# EAGLE board isl1 (EAGLE 7.5.0)
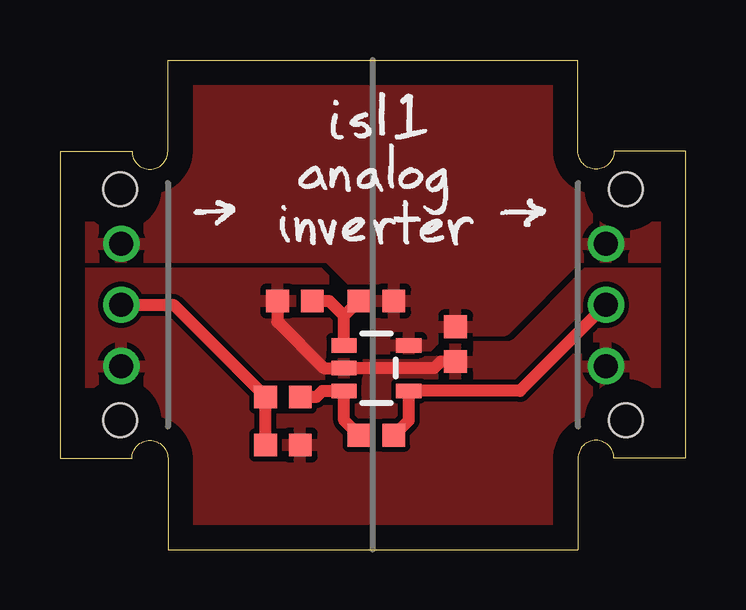
[diagram p0: board, top side]
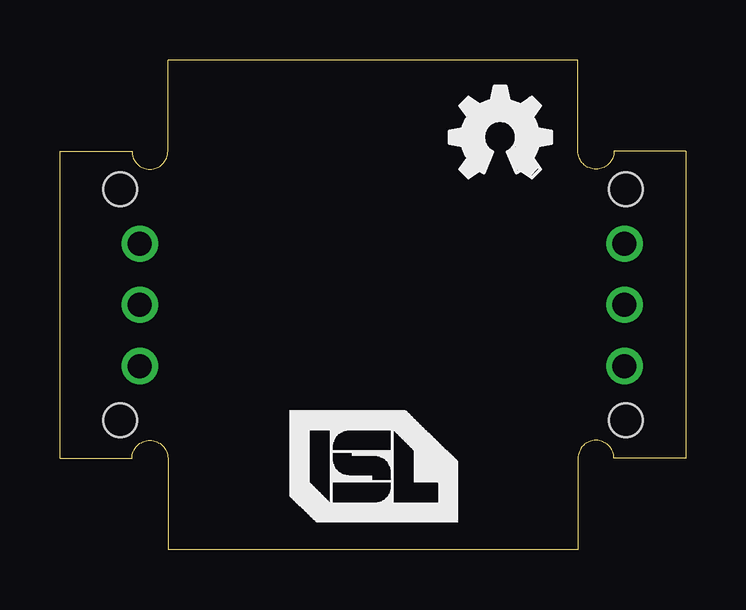
[diagram p1: board, bottom side, seen from below]

Size 26.1 x 20.4 mm. Coordinates in mm from the lower left corner, seen from the top.
Outline: 4.5,20.4 21.6,20.4
Outline: 4.5,0 21.6,0
Copper layers (1*16): Top 0.035mm / dielectric 1.5mm / Bottom 0.035mm
Design rules "default": minimum track width 10mil, minimum drill 24mil, track to track 8mil, track to pad 8mil, pad to pad 8mil, via to via 8mil, smd to smd 8mil, copper to edge 40mil, drill to drill 8mil, minimum pad ring 10mil, minimum via ring 8mil, stop-mask expansion 4mil, vias tented up to drill 0mil, thermal gap 10mil

## Footprints (pad centres in the part's own frame; a part is rotated, then mirrored left to right if it is on the bottom)
SMT0603 = smd 0.95 x 0.95: 1 -0.725,0; 2 0.725,0
BITSNAP_INPUT_MALE = drill 1: 1 -2.55,2.56; 2 0,2.56; 3 2.55,2.56 | hole 1.4: -4.82,2.5; 4.82,2.5
BITSNAP_OUTPUT_FEMALE = drill 1: 1 -2.55,3.33; 2 0,3.33; 3 2.55,3.33 | hole 1.4: -4.82,2.5; 4.82,2.5
SOT23-5 = smd 0.6 x 1.05: 1 -0.95,-1.35; 2 0,-1.35; 3 0.95,-1.35; 4 0.95,1.35; 5 -0.95,1.35

## Placement (x,y rotation side)
C1  CAP.1U  [SMT0603]  16.49,8.56 90 top
J1  BITSNAPINPUT  [BITSNAP_INPUT_MALE]  0,10.2 270 top
J2  BITSNAPOUTPUT  [BITSNAP_OUTPUT_FEMALE]  26.1,10.2 90 top
R1  RES10K  [SMT0603]  13.19,4.76 0 top
R2  RES10K  [SMT0603]  9.29,6.36 0 top
R3  RES10K  [SMT0603]  13.19,10.36 180 top
R4  RES10K  [SMT0603]  9.79,10.36 0 top
R5  RES10K  [SMT0603]  9.29,4.36 180 top
U1  LMV321  [SOT23-5]  13.19,7.56 270 top
U$10  [OSHW_FILLX150_NOTEXT]  10.7,15.5 90 top
U$11  [ISL_LOGO]  16.6,1 0 bottom
U$12  [ISL1_LABEL]  12.83,15.38 0 top
U$13  [ARROW]  6.41,14.07 0 top
U$14  [ARROW2]  19.31,14.07 0 top

## Library data of the parts
C1 = Common; MFR: Murata; MPN: GRM188R71H104KA93D; VND: DigiKey; VPN: 490-1519-6-ND
J1 J2 U1 U$10-U$14 = BitLab
R1-R5 = Common; MFR: Panasonic; MPN: ERJ-3EKF1002V; VND: DigiKey; VPN: P10.0KHDKR-ND

## Nets
5V0: C1.2 J1.1 J2.3 R3.1 U1.5
GND: C1.1 J1.3 J2.1 R4.1 R5.1 U1.2
N$1: J1.2 R2.1 R5.2
N$2: R1.1 R2.2 U1.3
N$3: R3.2 R4.2 U1.1
N$4: J2.2 R1.2 U1.4

## Tracks (layer width: path | path; a pad name or v marks a point on that pad's centre or on a via)
5V0
  pour Top: 0,20.32 0,12.19 11.18,12.19 13.21,10.16 13.21,8.38 15.24,8.38 16,9.14 18.54,9.14 21.59,12.19 26.16,12.19 26.16,20.32
GND
  Top 0.508: C1.1 15.87,7.84 15.59,7.56 U1.2 10.99,7.56 9.07,9.49 R4.1
  pour Top (rank 2): 0,0 0,20.4 26.1,20.4 26.1,0
N$1
  Top 0.508: R5.2 R2.1 4.73,10.2 J1.2
N$2
  Top 0.508: R1.1 11.84,5.39 U1.3 10.94,6.61 10.69,6.36 R2.2
N$3
  Top 0.508: U1.1 11.84,9.74 | 11.84,9.74 R3.2 | R4.2 11.22,10.36 11.84,9.74
N$4
  Top 0.508: R1.2 14.54,5.39 U1.4 19.18,6.61 J2.2